# Altium PCB Mopf.PcbDoc
Units mil, origin at the board's own origin, x right, y up, seen from the top; angles counter-clockwise.
Board outline 773.92 x 799.91 mil, 4 copper layers (TOP, SIG, VSS, BOT), stack 31.6 mil thick; 38 components, 59 nets, 162 pads, 121 vias.
Unrouted connection lines stored in the file: 1.
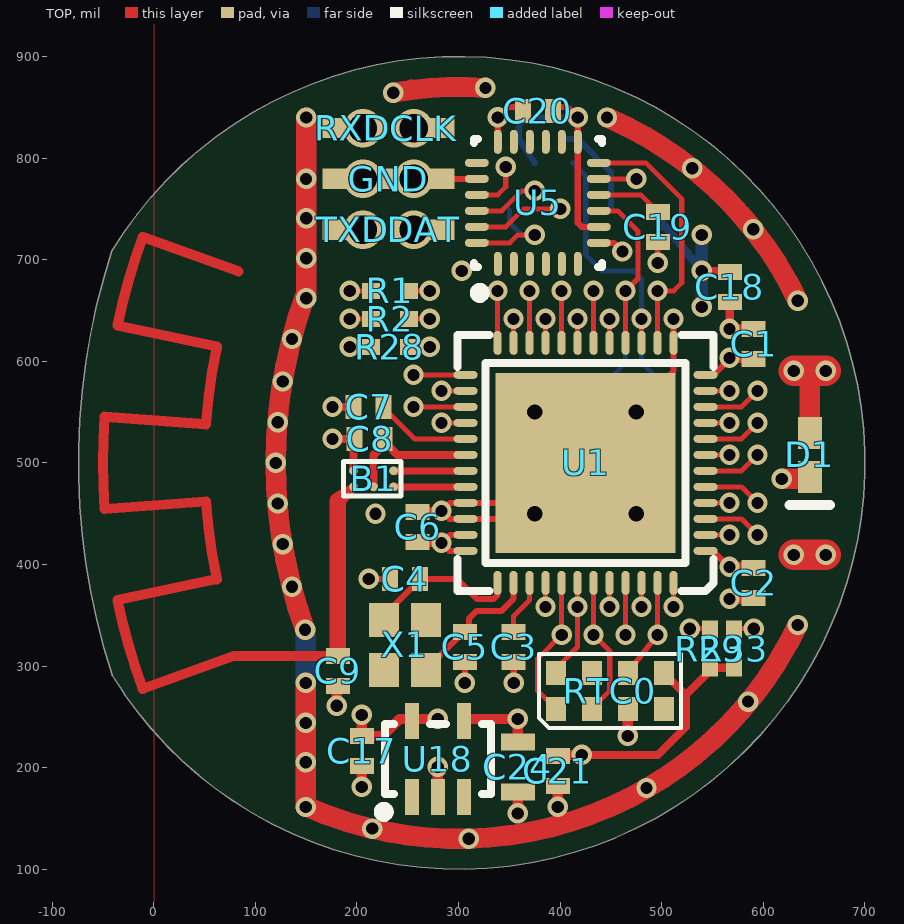
[diagram p0: TOP view]
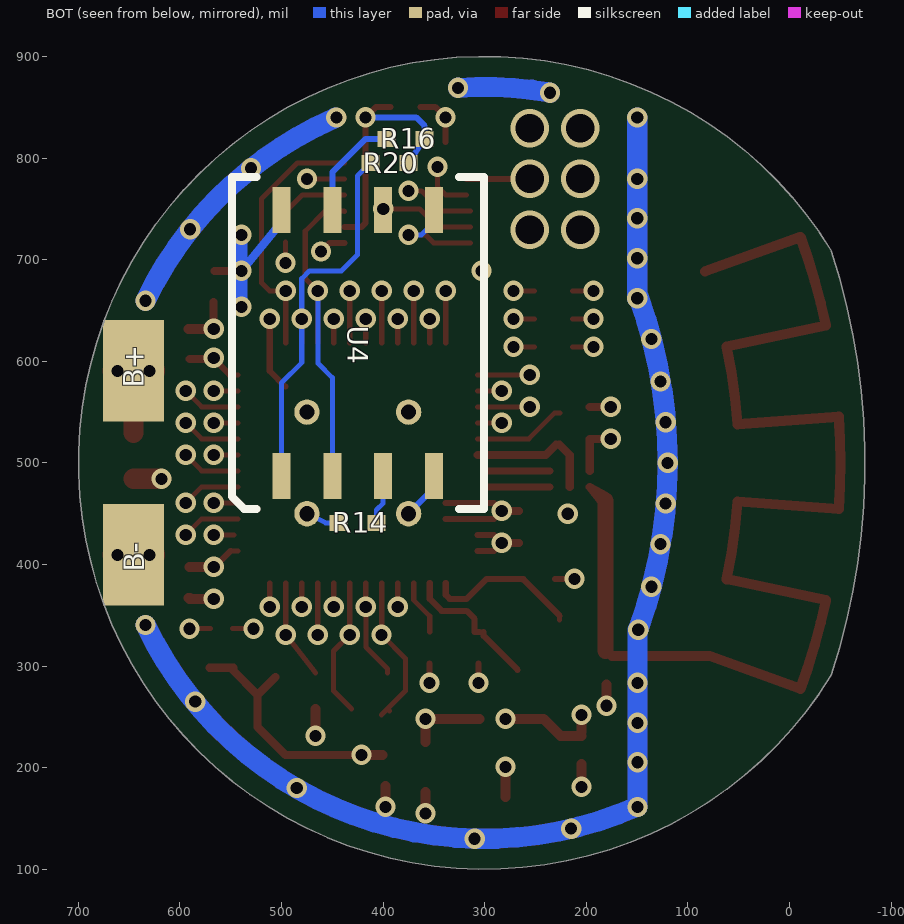
[diagram p1: BOT view, seen from below]
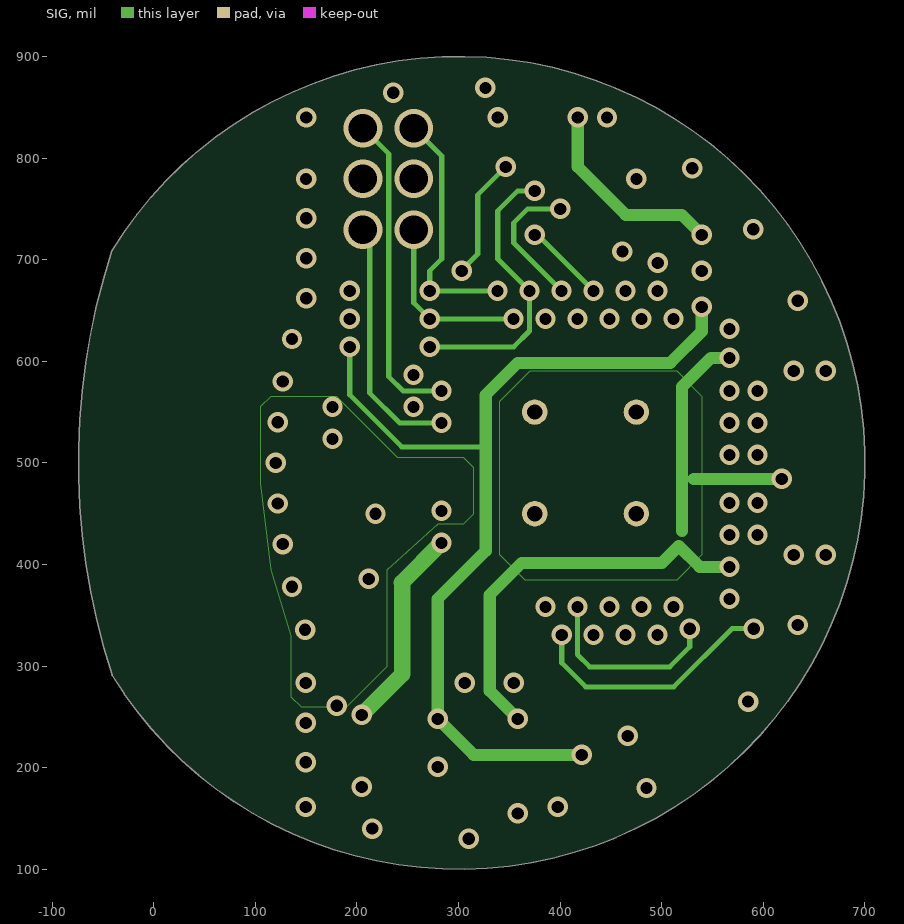
[diagram p2: SIG]
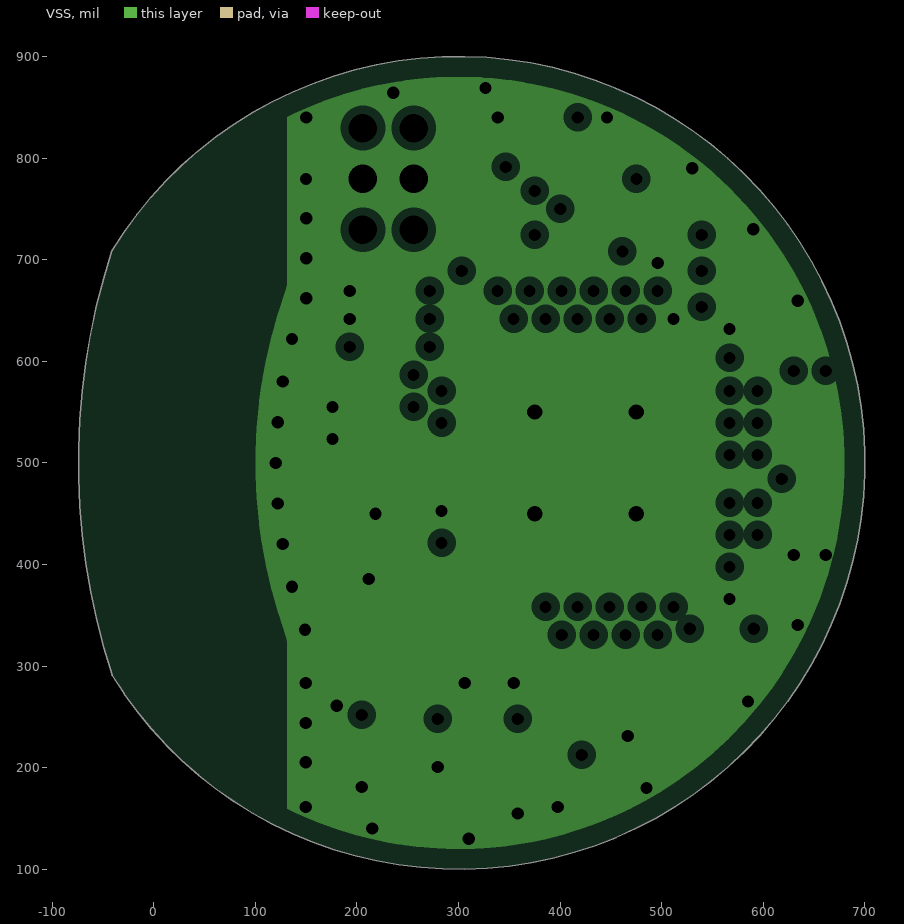
[diagram p3: VSS, clearances drawn from the general rule]

## Layer stack, top to bottom
Top Solder: solder mask 0.4, Solder Resist, Dk 3.5
TOP: signal copper 1.4
Dielectric1: prepreg 6, FR-4, Dk 4.8
SIG: signal copper 1.4
Dielectric2: core 14, FR-4, Dk 4.8
VSS: plane copper 1.4, net GND
Dielectric3: prepreg 6, FR-4, Dk 4.8
BOT: signal copper 1.4
Bottom Solder: solder mask 0.4, Solder Resist, Dk 3.5

## Board outline
-41.11,291.08 ccw(c300,500) -41.26,708.66 -41.17,708.61 ccw(c600.79,500)

## Design rules (kind name [scope] priority, off if disabled: settings)
Clearance "Top Polygon" [(InPolygon)] p1: gap=5
Clearance [All] p2: gap=3
ComponentClearance [All] p1: gap=5 collisioncheckmode=3 verticalgap=5 showdistances=FALSE
FabricationTestPointUsage TestPointUsage [All] p1: valid=0 allowmultiple=FALSE
FabricationTestpoint Testpoint [All] p1: side=3 testpointundercomponent=TRUE minsize=40 maxsize=100 preferedsize=60 minholesize=0 maxholesize=40 preferedholesize=32 testpointgrid=1 allowsidetop=TRUE allowsidebottom=TRUE usegrid=TRUE gridtolerance=0.01
HoleSize [All] p1: absolutevalues=TRUE maxlimit=250 minlimit=3 maxpercent=80.000 minpercent=20.000
MinimumAnnularRing [All] p1: minimumring=2
PasteMaskExpansion [All] p1: expansion=-1
PlaneClearance [All] p1: clearance=8
PlaneConnect [All] p1: planeconnectstyle=Direct reliefexpansion=25 reliefentries=4 reliefconductorwidth=20 reliefairgap=10
PolygonConnect [All] p1: connectstyle=Direct reliefconductorwidth=15 reliefentries=4 polygonreliefangle="45 Angle" airgapwidth=10
RoutingLayers [All] p1: top layer_v5=TRUE mid layer 2_v5=FALSE bottom layer_v5=TRUE
RoutingVias [All] p1: holewidth=12 width=22 viastyle="Through Hole" minholewidth=3 minwidth=8 maxholewidth=65 maxwidth=100
SilkToSolderMaskClearance SilkscreenOverComponentPads [IsPad] p1: minsilkscreentomaskgap=10 clearancetoexposedcopper=TRUE
SolderMaskExpansion [All] p1: expansion=3
Width [All] p1: maxlimit=200 minlimit=3 preferedwidth=10 toplayer_maxwidth=100 midlayer2_maxwidth=100 minimp=50.000000 maximp=50.000000 favimp=50.000000
20 further rules are at their usual default settings.

## Classes and differential pairs
component class Mopq: * B+ B- C9 C17 C24 D1 ID1 U18
component class Motion: C19 C20 C21 R28 U5
component class Memory: C18 R14 R16 R20 U4
component class Bluetooth: B1 C1 C2 C3 C4 C5 C6 C7 C8 CLK DAT R1 R2 RTC0 RXD TXD U1 X1

## Components (designator, comment, footprint, x,y, rotation, side; value= is the part's Value field where it differs from the comment)
B1 "BAL-NRF02D3" BAL-ST-WLCSP 216.34,484.25 r180 top locked
B+ "5016" TP0875x050#1 651.97,578.15 r180 bottom
B- "5016" TP0875x050#2 651.97,417.91 r90 bottom
C1 "0.1u" CAP0402 590.35,617.13 r270 top
C2 "0.1u" CAP0402 590.35,381.89 r90 top
C3 "0.1u" CAP0402 354.13,318.9 r90 top
C4 "27p" CAP0402 247.09,385.83 r0 top
C5 "27p" CAP0402 306.14,318.9 r90 top
C6 "1000p" CAP0402 259.65,437.01 r270 top
C7 "0.047u" CAP0402 211.42,555.12 r0 top
C8 "2200p" CAP0402 212.4,523.62 r0 top
C9 "1.0p" CAP0402 181.1,295.28 r90 top
C17 "4.7u" CAP0402 204.72,216.54 r90 top
C18 "0.1u" CAP0402 566.93,673.23 r90 top
C19 "0.1u" CAP0402 496.06,732.28 r90 top
C20 "10nF" CAP0402 377.95,846.46 r0 top
C21 "0.1u" CAP0402 397.64,196.85 r90 top
C24 "4.7u" CAP0603 358.27,200.79 r90 top
CLK "5016" TP0875x050#3 265.91,829.53 r90 top
D1 "1PS79SB31" SOD-523 645.67,507.87 r90 top
DAT "5016" TP0875x050#4 255.91,729.53 r180 top
GND "5016" TP0875x050#5 230.91,779.53 r90 top
R1 "12k" RES0402 232.28,669.29 r180 top
R2 "12k" RES0402 232.28,641.73 r180 top
R14 "100k" RES0402 425.2,440.94 r180 bottom
R16 "100k" RES0402 377.95,818.9 r180 bottom
R20 "100k" RES0402 393.7,795.28 r0 bottom
R28 "100k" RES0402 232.28,614.17 r180 top
R29 "100k" RES0402 547.24,317.09 r270 top
R33 "100k" RES0402 570.87,317.09 r270 top
RTC0 "AB-RTCMC-32.768kHz-AIGZ" 8-CLCC 448.82,275.59 r0 top
RXD "5016" TP0875x050#3 195.91,829.53 r90 top
TXD "5016" TP0875x050#3 195.91,729.53 r90 top
U1 "nRF51822-QF" VQFN40P600X600X100-48 425,500 r180 top locked
U4 "MX25U12835F" "WSON 8L" 425,618.11 r90 bottom
U5 "InvenSense MPU-6500" QFN-24 377.95,755.9 r90 top locked
U18 "TPS79718" SOT65P212X110-5N 279.53,208.66 r90 top locked
X1 "ILCX19" ILCX19 211.65,362.2 r270 top

## Footprints (in the part's own frame and the unit in brackets; to place one, negate y for a bottom-side part, rotate by r counter-clockwise, add the part's x,y. Pads: shape width x height; smd on the part's side, far side on the other; paste and mask are expansions set on the pad)
8-CLCC [mm] "8 lead CLCC package, 2.3 x 1.5mm"
  rect 0.5x0.6 smd: 1(-1.35,-0.45) 2(-0.45,-0.45) 3(0.45,-0.45) 4(1.35,-0.45) 5(1.35,0.45) 6(0.45,0.45) 7(-0.45,0.45) 8(-1.35,0.45)
  silkscreen extent -1.78,-0.92 1.78,0.92, body extent -1.6,-0.75 1.6,0.75, height 0.8
BAL-ST-WLCSP [mm]
  round 0.22 smd mask+0.05: A1(0.5,0.2) A2(0,0.2) A3(-0.5,0.2) B1(0.5,-0.2) B3(-0.5,-0.2)
  TOP pour cut-out: -0.697,-0.43 0.756,-0.43 0.756,0.44 -0.697,0.44
  silkscreen extent -0.69,-0.43 0.76,0.43, body extent -0.7,-0.43 0.76,0.43, height 0.63
CAP0402 [mm] "Chip Capacitor, 2-Leads, Body 0402 / 0.10x0.50mm, IPC High Density"
  rect 0.4x0.6 smd: 1(-0.375,0) 2(0.375,0)
  body extent -0.53,-0.28 0.53,0.28, height 0.55
CAP0603 [mm] "Chip Capacitor, 2-Leads, Body 0603 / 1.60x0.8mm, IPC High Density"
  rect 0.425x0.85 smd: 1(-0.625,0) 2(0.625,0)
  body extent -0.8,-0.4 0.8,0.4, height 0.8
ILCX19 [mm] "ILSI ILCX19 Crystal Oscillator 2.0 x 1.6 x 0.45mm"
  rect 0.85x0.75 smd: 1(0.425,0.375) 2(1.675,0.375) 3(1.675,1.425) 4(0.425,1.425)
  body extent 0.05,0.1 2.05,1.7, height 0.45
QFN-24 [mm]
  oval 0.6x0.2 smd: 1(-1.525,1) 2(-1.525,0.6) 3(-1.525,0.2) 4(-1.525,-0.2) 5(-1.525,-0.6) 6(-1.525,-1) 13(1.525,-1) 14(1.525,-0.6) 15(1.525,-0.2) 16(1.525,0.2) 17(1.525,0.6) 18(1.525,1)
  oval 0.2x0.6 smd: 7(-1,-1.525) 8(-0.6,-1.525) 9(-0.2,-1.525) 10(0.2,-1.525) 11(0.6,-1.525) 12(1,-1.525) 19(1,1.525) 20(0.6,1.525) 21(0.2,1.525) 22(-0.2,1.525) 23(-0.6,1.525) 24(-1,1.525)
  TOP pour cut-out: -1.35,1.35 -1.35,-1.35 1.35,-1.35 1.35,1.35
  silkscreen extent -2.37,-1.6 1.6,1.6, body extent -1.45,-1.45 1.45,1.45, height 0.95
RES0402 [mm] "Chip resistor 0402 high density"
  rect 0.45x0.4 smd: 1(-0.475,0) 2(0.475,0)
  body extent -0.61,-0.2 0.6,0.2, height 0.5
SOD-523 [mm] "Diode small package"
  rect 0.8x0.6 smd: 1(0.55,0) 2(-0.55,0)
  silkscreen extent -1.25,-0.5 -1.25,0.5, body extent -1.12,-0.6 1.12,0.6, height 0.65
SOT65P212X110-5N [mm] "SOT23, 5-Leads, Body 2.3x2.3mm (max), Pitch 0.65mm, IPC Medium Density"
  rect 0.9x0.35 smd: 1(-0.95,0.65) 2(-0.95,0) 3(-0.95,-0.65) 4(0.95,-0.65) 5(0.95,0.65)
  silkscreen extent -1.45,-1.33 0.88,1.47, body extent -0.67,-1.12 0.67,1.13, height 1.1
TP0875x050#1 [mm] "Test Pad 0.875x0.50mm"
  rect 1.524x2.54 smd: 1(0.16,0.315)
TP0875x050#2 [mm] "Test Pad 0.875x0.50mm"
  rect 2.54x1.524 smd: 1(-0.215,-0.16)
TP0875x050#3 [mm] "Test Pad 0.875x0.50mm"
  rect 0.508x1.524 smd: 1(0,0)
TP0875x050#4 [mm] "Test Pad 0.875x0.50mm"
  rect 1.524x0.508 smd: 1(-0.254,0)
TP0875x050#5 [mm] "Test Pad 0.875x0.50mm"
  rect 0.508x3.302 smd: 1(0,0)
VQFN40P600X600X100-48 [mm]
  round 0.635 hole 0.381: 0(-1.27,1.27) 0(-1.27,-1.27) 0(1.27,1.27) 0(1.27,-1.27)
  rect 4.5x4.5 smd: 0(0,0)
  oval 0.6x0.2 smd: 1(-3,2.2) 2(-3,1.8) 3(-3,1.4) 4(-3,1) 5(-3,0.6) 6(-3,0.2) 7(-3,-0.2) 8(-3,-0.6) 9(-3,-1) 10(-3,-1.4) 11(-3,-1.8) 12(-3,-2.2) 25(3,-2.2) 26(3,-1.8) 27(3,-1.4) 28(3,-1) 29(3,-0.6) 30(3,-0.2) 31(3,0.2) 32(3,0.6) 33(3,1) 34(3,1.4) 35(3,1.8) 36(3,2.2)
  oval 0.2x0.6 smd: 13(-2.2,-3) 14(-1.8,-3) 15(-1.4,-3) 16(-1,-3) 17(-0.6,-3) 18(-0.2,-3) 19(0.2,-3) 20(0.6,-3) 21(1,-3) 22(1.4,-3) 23(1.8,-3) 24(2.2,-3) 37(2.2,3) 38(1.8,3) 39(1.4,3) 40(1,3) 41(0.6,3) 42(0.2,3) 43(-0.2,3) 44(-0.6,3) 45(-1,3) 46(-1.4,3) 47(-1.8,3) 48(-2.2,3)
  silkscreen extent -3.2,-3.2 3.2,3.2
"WSON 8L" [mm] "WSON 8L 8x6x0.8mm"
  rect 1.15x0.45 smd: 1(-3.325,1.905) 2(-3.325,0.635) 3(-3.325,-0.635) 4(-3.325,-1.905) 5(3.325,-1.905) 6(3.325,-0.635) 7(3.325,0.635) 8(3.325,1.905)
  silkscreen extent -4.15,-3.15 4.15,3.15, body extent -4,-3 4,3, height 0.8

## Part data
B1: library part BAL-ST-5pin_DC-Flip, "50 ohm balun transformer for 2.45GHz ISM"
B+ B- CLK DAT GND RXD TXD: "Single-pad test point"
C1 C2 C3 C19 C21: library part C_0.1u_10_10_X5R_0201, "Chip capacitor"
C4 C5: library part C_27p_5_50_C0G_0201, "Chip capacitor"
C6: library part C_1000p_10_25_X7R_0201, "Chip capacitor"
C7: library part C_0.047u_10_16_X7R_0402, "Chip capacitor"
C8 C9: library part C_2200p_5_16_STD_0402, "Chip capacitor"
C17 C24: library part C_4.7u_10_10_JB_0402, "Chip capacitor"
C18: library part C_0.1u_10_6.3_X5R_0201, "Chip capacitor"
C20: library part CAP0201, "Chip capacitor"
D1: "Schottky diode, 30V 200mA"
R1 R2: library part R_12k_0.5_0.063_0402, "Chip Resistor"
R14 R16 R20 R28 R29 R33: library part R_100k_5_0.05_0201, "Chip Resistor"
RTC0: "Abracon I2C RTC w/ integrated XO"
U1: library part nRF51822_QF, "Multi-protocol Bluetooth Low Energy and 2.4GHz proprietary system-on-chip"
U4: "Macronix MX25U12835F SPI NOR Flash"
U5: library part MPU-6500, "InvenSense MPU-6500 6-axis accelerometer and gyroscope"
U18: library part TPS79718DCK, "LDO 1.8V SC70-5"
X1: "ILSI ILCX19 Crystal Oscillator"

## Via types
v1: diameter 20, hole 12, TOP to BOT, 115 vias
v2: diameter 38, hole 28, TOP to BOT, 6 vias

## Nets (pads, with @x,y where several pads share a name; then routed paths per layer and width w, separated by ;. In a path a pad name is that pad's centre, name@x,y a point inside that pad or via, vN(x,y) a via of type N, cw(c..) or ccw(c..) an arc to the next point about the centre after c; other vN are vias at no path point)
1V8: C6.2 C17.2 U1.35 U1.36 | length 289.3
  TOP w6: U1.36 291.14,413.39 v1(283.27,421.26) 291.14,429.13 U1.35
  TOP w7.87: C6.2@266.54,421.26 v1(283.27,421.26)
  TOP w10: C17.2@204.72,235.24 v1(204.72,251.97)
  SIG w16: v1(204.72,251.97) 244.59,291.83 244.59,382.09 ; 244.09,382.09 v1(283.27,421.26)
1V8_EN: U1.3 | length 57.7
  TOP w5: U1.3 578.54,444.88 v1(594.29,429.13)
3V3_EN: U1.11 | length 23.6
  TOP w5: U1.11 v1(566.73,570.87)
AD_ENABLE: U1.48 | length 23.8
  TOP w5: v1(511.61,358.27) U1.48
  SIG w5: v1(511.61,358.27) v1@511.81,358.27
AIN0: U1.45 | length 51.2
  TOP w5: v1(464.37,330.71) U1.45
AIN1: U1.46 | length 23.6
  TOP w5: v1(480.12,358.27) U1.46
AIN2: U1.5 | length 57.7
  TOP w5: U1.5 578.54,476.38 v1(594.29,460.63)
AIN3: U1.6 | length 57.7
  TOP w5: U1.6 578.54,492.13 v1(594.29,507.87)
AIN4: U1.7 | length 23.6
  TOP w5: U1.7 v1(566.73,507.87)
AIN5: U1.8 | length 57.7
  TOP w5: U1.8 578.54,523.62 v1(594.29,539.37)
AIN6: U1.9 | length 23.6
  TOP w5: U1.9 v1(566.73,539.37)
AIN7: U1.10 | length 57.7
  TOP w5: U1.10 578.54,555.12 v1(594.29,570.87)
ANT1: B1.B3 U1.31 | length 63
  TOP w7: B1.B3 U1.31@299.02,492.13
ANT2: B1.A3 U1.32 | length 63
  TOP w7: B1.A3 U1.32@299.02,476.38
AUX_SCL: U5.7 | length 26.7
  TOP w6: U5.7 452.76,716.53 v1(461.22,708.07)
AUX_SDA: U5.21 | length 171
  TOP w5: U5.21 338.58,763.78 346.46,771.65 v1(346.46,791.34)
  SIG w5: v1@303.15,689.76 318.9,705.51 318.9,763.78 v1(346.46,791.34)
  other v1: 303.15,688.98
BLE_ANT: B1.A1 C9.2 | length 1300
  TOP w8: 181.47,467.94 B1.A1 185.83,462.6
  TOP w10: 51.31,462.02 -48.42,454.66 cw(c600,500) -48.42,545.34 51.31,537.98 ; 51.34,461.63 ccw(c600,500) 62.02,385.65 ; 51.34,538.37 cw(c600,500) 62.02,614.35 ; 62.05,385.49 -35.8,364.86 ccw(c600,500) -10.8,277.69 79.11,309.98 C9.2@174.93,309.98 ; 62.05,614.51 -35.8,635.14 cw(c600,500) -10.8,722.31 83.31,688.51
  TOP w16: C9.2@181.1,314.96 181.1,462.83
DCC: U1.2 | length 19.7
  TOP w5: U1.2@547.05,429.13 v1(566.73,429.13)
DEC1: C3.2 U1.39 | length 54.8
  TOP w5: C3.2 354.13,349.13 369.88,364.88 U1.39
DEC2: C7.2 U1.29 | length 91.3
  TOP w5: C7.2@226.18,549.21 231.1,549.21 256.69,523.62 U1.29
FLASH_CS: R20.2 U1.15 U4.1 | length 373.6
  TOP w5: U1.15 v1(480.12,641.73)
  BOT w5: R20.2 425.2,782.48 425.2,704.72 440.94,688.98 472.44,688.98 480.12,681.3 v1(480.12,641.73) 480.12,598.62 500,578.74 U4.1@500,500
FRST: R16.1 U4.7 | length 100.1
  BOT w6: R16.1@400.59,818.9 417.32,818.9 450,786.22 U4.7
FSYNC: U5.11 | length 37
  TOP w5: U5.11 v1(475,779.53)
FWPT: R14.2 U4.3 | length 49
  BOT w5: U4.3 400,460.24 406.5,453.74 R14.2
GND: B1.B1 B-.1 C1.1 C2.1 C3.1 C4.1 C5.1 C6.1 C7.1 C8.1 C9.1 C17.1 C18.1 C19.1 C20.1 C21.1 C24.1 GND.1 R1.2 R2.2 R14.1 RTC0.3 U1.0 U1.13 U1.33 U1.34 U4.4 U5.18 U5.20 U18.2 | length 4006.2
  TOP w5: v1(192.91,641.73) R2.2 ; v1(192.91,669.29) R1.2 ; v1(496.06,696.85) C19.1
  TOP w6: v1(211.65,385.83) C4.1@230.83,385.83 ; v2(255.91,779.53) U5.20 ; v1(306.14,283.46) C5.1@306.14,302.64 ; U1.0@338.39,444.88 U1.34 291.14,444.88 v1(283.27,452.76) 291.14,460.63 U1.33 U1.0@338.39,460.63 ; U5.18 338.58,840.05 348.92,850.39 C20.1@363.19,850.39 ; v1(354.33,283.46) C3.1@354.33,302.64 ; U1.0@496.18,575 511.61,590.43 U1.13 v1(511.61,641.73) v1@511.87,641.98
  TOP w7.87: C6.1@266.54,452.76 v1(283.27,452.76)
  TOP w8: v1(175.98,523.62) 196.65,523.62 B1.B1 ; v1(175.98,555.12) C7.1 ; v1@566.93,631.89 C18.1
  TOP w10: v1(180.16,260.9) C9.1@180.16,281.57 ; v1(204.72,181.1) C17.1@204.72,203.74 ; U18.2 v1(279.53,200.79) ; v1(358.27,155) C24.1 ; v1(397.64,161.42) C21.1 ; v1(466.54,231.3) RTC0.3 ; v1(566.73,366.14) C2.1@590.35,366.14 ; v1(566.73,631.89) C1.1@591.34,631.89 ; C2.1 C2.1@591.34,367.13
  TOP w20: v1(148.95,335.83) cw(c600,500) v1@148.95,664.17 ; v1(149.61,161.22) v1(149.61,283.46) ; v1@150,664.17 v1(150,840) ; v1@151.25,161.22 ccw(c300,500) v1(633.84,340.47) ; v1(235.75,864.38) cw(c300,500) v1(326.36,869.06) ; v1(446.03,839.96) cw(c300,500) v1(633.84,659.53)
  TOP w30: v1(629.92,409.45) v1(661.42,409.45)
  BOT w5: R14.1 456.69,440.94 U1.0@472.44,448.82
  BOT w6: U4.4@347.64,477.56 U1.0@375,450.2
  BOT w20: v1(148.95,335.83) cw(c600,500) v1@148.95,664.17 ; v1(149.61,161.22) v1@149.61,335.83 ; v1@149.88,161.82 ccw(c300,500) v1(633.84,340.47) ; v1(150,662.01) v1(150,840) ; v1(235.75,864.38) cw(c300,500) v1(326.36,869.06) ; v1@447,839.54 cw(c300,500) v1(633.84,659.53)
  other v1: 310,130 215,140 485,180 149.65,205.32 149.61,244.09 585,265 136,378 127,420 218.31,450 122,460 120,500 122,540 127,580 136,622 150,701.38 590,730 150,740.75 149.96,779.53 530,790 338.58,840.06
  other v2: 205.91,779.53
GPS_CS: U1.19 | length 23.6
  TOP w5: U1.19 v1(417.13,641.73)
GPS_EN: U1.21 | length 23.6
  TOP w5: U1.21 v1(385.63,641.73)
GPS_INT: U1.17 | length 23.6
  TOP w5: U1.17 v1(448.62,641.73)
HR_PWM: U1.27 | length 51.2
  TOP w5: v1(255.71,555.12) U1.27
  other v1: 255.71,555.12
HR_PWM2: U1.25 | length 51.2
  TOP w5: v1(255.71,586.61) U1.25
  other v1: 255.71,586.61
IMU_CS: R28.1 U1.22 U5.22 | length 443.7
  TOP w5: R28.1 v1(271.65,614.17) ; U5.22@313.98,748.03 342.52,748.03 362.2,767.72 374.02,767.72 v1@375,768.7 ; U1.22 v1(369.88,669.29)
  SIG w5: v1(271.65,614.17) 354.13,614.17 ; 354.33,614.17 369.88,629.72 v1(369.88,669.29) ; 354.33,684.84 v1(369.88,669.29) ; v1(375,767.72) 358.27,767.72 338.58,748.03 338.58,700.59 v1(369.88,669.29)
IMU_INT: U1.14 U5.12 | length 257.5
  TOP w5: U5.12 484.25,795.28 519.68,759.84 519.68,744.09 519.68,677.17 511.81,669.29 v1(495.87,669.29) U1.14
  BOT w6: v1(495.87,669.29) v1@495.87,669.49
IMU_MISO: U1.16 U4.2 U5.9 | length 337.4
  TOP w5: U5.9@437.99,747.44 438.58,748.03 456.69,748.03 476.72,728 476.72,681.45 v1@464.57,669.29 ; U1.16 v1(464.37,669.29)
  BOT w5: U4.2@450,500 450,583.86 464.12,597.98 464.12,669.04 v1(464.37,669.29)
IMU_MOSI: U1.18 U4.5 U5.24 | length 239.8
  TOP w5: U5.24@313.98,716.53 350.39,716.53 358.27,724.41 v1(375,724.41) ; U1.18 v1@432.87,671.26
  SIG w5: v1@376.38,725.79 v1(432.87,669.29)
  BOT w5: U4.5 350,736.61 362.2,724.41 v1(375,724.41)
IMU_SCLK: U1.20 U4.6 U5.23 | length 282.3
  TOP w5: U5.23@313.98,732.28 346.46,732.28 364.17,750 v1(400,750) ; U1.20 v1(401.38,669.29)
  SIG w5: 354.23,716.44 v1(401.38,669.29) ; 354.33,716.54 354.33,736.22 368.11,750 v1(400,750)
NBAT_STS: U1.44 | length 23.6
  TOP w5: v1(448.62,358.27) U1.44
NetC19_2: C19.2 U5.10 | length 65
  TOP w5: U5.10 479.33,763.78 C19.2
NetC52_1: 
NetR4_2: 
NetR14_2: 
NGG_INT: U1.40 | length 23.6
  TOP w5: v1(385.63,358.27) U1.40
NRESET: U18.1
RTC_CLK: RTC0.2 U1.43 | length 138
  TOP w5: RTC0.2 448.82,275.59 448.82,314.76 v1(432.87,330.71) U1.43
RTC_INT: RTC0.6 U1.47 | length 96.1
  TOP w5: RTC0.6 v1@494.09,328.74 ; v1(495.87,330.71) U1.47
RTC_SCL: R29.1 RTC0.8 U1.42 | length 306.6
  TOP w5: RTC0.8 395.67,297.24 417.07,318.65 417.07,358.22 v1(417.13,358.27) U1.42 ; v1(527.56,336.77) R29.1@548.23,336.77
  SIG w5: v1(417.13,358.27) 417.13,311.22 429.13,299.21 507.87,299.21 527.56,318.9 v1(527.56,336.77)
RTC_SDA: R33.1 RTC0.1 U1.41 | length 422.9
  TOP w5: RTC0.1@393.7,255.91 RTC0.1 ; U1.41 401.38,330.71 377.95,307.28 377.95,275.59 RTC0.1 ; RTC0.1@401.57,251.97 RTC0.1 ; R33.1@569.88,336.77 v1(590.55,336.77)
  SIG w5: v1(401.57,330.71) 401.57,303.15 425.2,279.53 511.81,279.53 569.06,336.77 v1(590.55,336.77)
RXD: RXD.1 U1.26 | length 336.6
  TOP w5: v1(283.27,570.87) U1.26
  SIG w5: v2(205.91,829.53) 231.3,804.13 231.3,584.88 245.32,570.87 v1(283.27,570.87)
  other v1: 283.27,570.87
STATUS0: 
STATUS1: 
SWDCLK: CLK.1 R1.1 U1.24 | length 315.1
  TOP w5: R1.1 v1(271.65,669.29) ; U1.24 v1(338.39,669.29)
  SIG w5: v2(255.91,829.53) 283.46,801.97 283.46,700.79 271.65,688.98 v1(271.65,669.29) v1(338.39,669.29)
SWDIO: DAT.1 R2.1 U1.23 | length 221.1
  TOP w5: R2.1 v1(271.65,641.73) ; U1.23 v1(354.13,641.73)
  SIG w5: v2(255.91,729.53) 255.91,657.48 v1(271.65,641.73) v1(354.13,641.73)
TXD: TXD.1 U1.28 | length 311.6
  TOP w5: v1(283.27,539.37) U1.28
  SIG w5: v2(205.91,729.53) 212.6,722.83 212.6,568.58 241.81,539.37 ; 241.81,539.37 v1(283.27,539.37) 241.81,539.37
  other v1: 283.27,539.37
VBAT: B+.1 D1.1 | length 92.5
  TOP w20: D1.1 645.67,590.55
  TOP w30: v1(629.92,590.55) v1(661.42,590.55)
VDD_PA: B1.A2 C8.2 U1.30 | length 130.3
  TOP w5.91: C8.2@226.3,517.83 C8.2@230,517.83
  TOP w8: B1.A2 216.34,507.87 C8.2@226.3,517.83 ; C8.2@230,517.83 239.96,507.87 291.14,507.87 U1.30
VIBE_EN: U1.4 | length 23.6
  TOP w5: U1.4 v1(566.73,460.63)
VIMU: C18.2 C20.2 C21.2 R16.2 R20.1 R28.2 R29.2 R33.2 RTC0.5 U4.8 U5.8 U5.13 U18.5 | length 1942.7
  TOP w5: v1(192.91,614.17) R28.2
  TOP w6: C20.2@392.72,850.38 406.99,850.38 v1(417.32,840.05) U5.13 417.32,736.22 421.26,732.28 U5.8
  TOP w8: v1(421.26,212.6) 496.06,212.6 523.62,240.16 523.62,271.65 ; RTC0.5@505.91,289.37 523.62,271.65 ; v1(539.37,688.98) C18.2@565.95,688.98 ; R29.2 R33.2 ; R29.2@548.8,296.83 523.62,271.65
  TOP w10: 204.72,231.3 225.39,231.3 242.13,248.03 v1(279.53,248.03) ; C21.2@400.59,212.6 v1(421.26,212.6)
  SIG w5: v1(192.91,614.17) 192.91,566.93 244.09,515.75 326.77,515.75
  SIG w12: v1(417.32,840.05) 417.32,791.34 464.57,744.09 519.68,744.09 v1(539.37,724.41) ; v1(421.26,212.6) 314.96,212.6 v1(279.53,248.03) 279.53,366.14 326.77,413.39 326.77,566.93 358.27,598.43 508.43,598.43 539.37,629.37 v1(539.37,653.54)
  BOT w6: R20.1 R16.2 359.25,831.69 367.61,840.05 v1(417.32,840.05)
  BOT w8: U4.8@500,732.28 U4.8 ; U4.8@503.94,732.28 v1(539.37,688.98) v1@539.37,692.91
  BOT w12: v1(539.37,653.54) v1(539.37,688.98) v1(539.37,724.41)
VMCU: C1.2 C2.2 C24.2 D1.2 U1.1 U1.12 U18.4 | length 896.4
  TOP w5: U1.1 U1.1@550,413.39 ; U1.12 U1.12@550.98,586.61
  TOP w6: U1.1@550,413.39 v1@566.73,396.65 ; U1.12@550.98,586.61 v1@566.73,602.36
  TOP w8: v1@566.73,602.36 C1.2
  TOP w10: U18.4@305.12,248.03 v1(358.27,248.03) C24.2 ; v1(566.73,397.64) C2.2@590.35,397.64
  TOP w20: v1(618.11,484.25) D1.2@645.67,484.25
  SIG w12: v1(358.27,248.03) 330.71,275.59 330.71,370.08 362.2,401.57 500.2,401.57 516.81,418.19 537.36,397.64 v1(566.73,397.64) ; 520,432.87 520,575 548.35,603.35 v1(566.73,603.35) ; 531.5,484.25 v1(618.11,484.25)
XC1: C4.2 U1.37 X1.1 | length 153.2
  TOP w5: X1.1 X1.1@226.42,349.41 ; C4.2@261.85,384.84 C4.2
  TOP w6: X1.1@226.42,349.41 C4.2@261.85,384.84 ; C4.2 298.27,385.83 317.95,366.14 334.45,366.14 338.39,370.08 U1.37
XC2: C5.2 U1.38 X1.3 | length 136.9
  TOP w6: X1.3 301.22,329.72 C5.2@301.22,333.66 ; C5.2@305.16,333.66 310.08,333.66 310.08,346.46 317.95,354.33 342.32,354.33 354.13,366.14 U1.38
pads on no net: RTC0.4 RTC0.7 U5.1 U5.2 U5.3 U5.4 U5.5 U5.6 U5.14 U5.15 U5.16 U5.17 U5.19 U18.3 X1.2 X1.4

## Polygon pours and split planes (outlines as drawn)
VMCU on SIG "Top-Shield" (solid, shelved, pour order 6): 340,410 365,385 515,385 540,410 540,565 515,590 370,590 340,560
GND on SIG "Top-Shield" (solid, shelved, pour order 4): 135,270 145,260 190,260 230,300 230,395 280,440 305,440 315,450 315,495 305,505 240,505 180,565 115,565 105,555 105,480 115,395 135,330
no net on TOP "Top-Shield" (solid, shelved, pour order 12): 0,3950 0,50 50,0 2650,0 2700,50 2700,3950 2650,4000 50,4000 0,3950
no net on BOT "Bottom-Power" (solid, shelved, pour order 7): 2649.04,4000 1425.96,4000 1375,3950 1375,2700 1425.96,2650 2649.04,2650 2700,2700 2700,3950 2649.04,4000
GND on VSS (split plane): 316.57,879.63 333.12,878.54 349.6,876.74 365.98,874.22 382.24,870.98 398.35,867.04 414.27,862.4 429.96,857.07 445.42,851.07 460.59,844.39 475.46,837.06 490,829.08 504.17,820.48 517.95,811.27 531.32,801.47 544.25,791.09 556.72,780.16 568.69,768.69 580.16,756.72 591.09,744.25 601.47,731.32 611.27,717.95 620.48,704.17 629.08,690 637.06,675.46 644.39,660.59 651.07,645.42 657.07,629.96 662.4,614.27 667.04,598.35 670.98,582.24 674.22,565.98 676.74,549.6 678.54,533.12 679.63,516.57 679.99,500 679.63,483.43 678.54,466.88 676.74,450.4 674.22,434.02 670.98,417.76 667.04,401.65 662.4,385.73 657.07,370.04 651.07,354.58 644.39,339.41 637.06,324.54 629.08,310 620.48,295.83 611.27,282.05 601.47,268.68 591.09,255.75 580.16,243.28 568.69,231.31 556.72,219.84 544.25,208.91 531.32,198.53 517.95,188.73 504.17,179.52 490,170.92 475.46,162.94 460.59,155.61 445.42,148.93 429.96,142.93 414.27,137.6 398.35,132.96 382.24,129.02 365.98,125.78 349.6,123.26 333.12,121.46 316.57,120.37 300,120.01 283.43,120.37 266.88,121.46 250.4,123.26 234.02,125.78 217.76,129.02 201.65,132.96 185.73,137.6 170.04,142.93 154.58,148.93 139.41,155.61 131.46,159.53 131.46,322.15 131.07,326.07 130.18,329 130.19,329 130.09,329.29 129.93,329.84 129.86,329.97 124.48,345.49 118.78,364.28 113.82,383.28 109.61,402.46 106.16,421.78 103.47,441.23 101.54,460.77 100.39,480.37 100,500 100.39,519.63 101.54,539.23 103.47,558.77 106.16,578.22 109.61,597.54 113.82,616.72 118.78,635.72 124.48,654.51 129.86,670.03 129.93,670.16 130.09,670.71 130.19,671 130.18,671 131.07,673.93 131.46,677.85 131.46,840.47 139.41,844.39 154.58,851.07 170.04,857.07 185.73,862.4 201.65,867.04 217.76,870.98 234.02,874.22 250.4,876.74 266.88,878.54 283.43,879.63 300,879.99

## Other copper
TOP:
  text "1" at 1000,350 h60 r90
SIG:
  text "2" at 1000,425 h60 r90
BOT:
  text "4" at 1000,625 h60 r90
VSS (plane layer: these items are gaps in the copper):
  region: 1030,325 1030,500 900,500 900,325
  region: 1025,593.7 1025,700 895,700 895,593.7
  lines w40: -60,380 -60,620 ; -25,275 -25,730 ; 10,230 10,770 ; 45,195 45,805 ; 78.9,580 78.9,829.58 ; 80,169.62 80,425 ; 111.36,151.77 111.36,322.15 cw(c600,500) 111.36,677.85 111.36,848.23
  text "3" at 1000,525 h60 r90

## Silkscreen, mask and mechanical layers (free items; w line width, h text height)
Mechanical 1:
  lines w10: -41.26,708.66 cw(c300,500) -41.11,291.08 cw(c600.79,500) -41.17,708.61 ; 500,153.59 cw(c558.65,60.56) 668.62,60.01 668.62,0 ; 500,846.41 ccw(c558.65,939.44) 668.62,939.99 668.62,1000
Mechanical 13:
  circle w10: c517.13,503.94 r25
  circle w10: c350,500 r500
  circle w10: c400,500 r400
  circle w10: c300,500 r400
Mechanical 15:
  lines w10: 93.11,303.15 -25,303.15 -25,381.89 93.11,381.89 93.11,460.63 -25,460.63 -25,539.37 93.11,539.37 93.11,618.11 -25,618.11 -25,696.85 93.11,696.85
Drill Drawing:
  lines w5: 7140,-710 7140,1790 12890,1790 ; 7156,-710 12890,-710 ; 8015.23,4347.28 10215.23,4347.28 ; 9340,-710 9340,-460 ; 9340,1790 9340,965 ; 10665,15 10665,440 ; 11440,-696 11440,-464 11440,15 11440,440 ; 12879,961 9340,965 ; 12890,-700 12890,1797 ; 12890,-460 9340,-460 ; 12890,15 9340,15 ; 12890,440 9340,440 ; 9340,-460 9340,15 ; 9340,15 9340,440 ; 9340,440 9340,965
  lines w8: 7156,-710 -1435,-710 -1435,8650 12890,8650 12890,1785
  lines w20: 1125,1950 2075,1950 ; 1125,2100 2075,2100 ; 1125,2350 2075,2350 ; 1125,2500 2075,2500
  text "FABRICATION NOTES" at 7486,8095 h120
  text "4 LAYER BOARD" at 7481,7866 h120
  text "1. Material to be CEM3, FR4, or MC3 @" at 7502,7626 h85
  text "0.031\" +/- .005\" nominal thickness." at 9900,7626 h85
  text "2. Finished copper thickness to" at 7494,7484 h85
  text "be 1 oz." at 9370,7484 h85
  text "requirements for" at 10913,7362 h85
  text "nent side to meet IPC600" at 9325,7355 h85
  text "3. All holes drilled from compo" at 7494,7348 h85
  text "breakout.  Hole size indicates finished diameter" at 7660,7225 h85
  text "4. All tooling hole centers to be within +/- .003\" of center of datum hole" at 7494,7074 h85
  text "All other hole centers to be within +/- .005\" of center datum hole" at 7668,6937 h85
  text "5. Trace width reduction due to etch factor, pits or dents is not to exceed .005\"" at 7494,6792 h85
  text "6. Minimum annular ring to meet" at 7501,6633 h85
  text "IPC600 requirements." at 9492,6626 h85
  text "7. Apply silkscreen using white" at 7501,6460 h85
  text "epoxy ink to component side," at 9347,6460 h85
  text "per artwork provided." at 11163,6460 h85
  text "8. Apply soldermask over bare copper per artwork provided." at 7501,6301 h85
  text "PC401 or SR1000 Green." at 7665,6160 h85
  text "9. Boards must display manufacturers UL company ID (or Trademark) and type" at 7510,6030 h85
  text "designator in copper or white epoxy ink." at 7660,5900 h85
  text "+/-" at 7481.35,4693.22 h85
  text ".XX" at 9323.92,2996.81 h85
  text "ANGLES" at 10313.92,2996.81 h85
  text ".XXX" at 9743.92,2988.81 h85
  text ".LEGEND" at 7625,2950 h100
  text ".005" at 9743.92,2828.81 h85
  text ".01" at 9331.92,2823.81 h85
  text "dimensions are in inches" at 10864.16,2781.72 h85
  text "Tolerances are:" at 10864.16,2631.72 h85
  text "Top Layer" at 450,2475 h60
  text "PrePreg" at 1475,2410 h30
  text "Sig Layer" at 450,2350 h60
  text "0.014 Core" at 1450,2200 h30
  text "0.031 +- 0.005 mils" at 2225,2200 h100
  text "Gnd Layer" at 450,2100 h60
  text "PrePreg" at 1480,2010 h30
  text "Bot Layer" at 450,1900 h60
  text "Unless otherwise specified" at 7276,1606 h85
  text "SayHello" at 10725,1600 h120
  text "1660 17th St" at 10525,1400 h120
  text "San Fransciso, CA 94105" at 10253,1239 h120
  text "Top Side Compenent Designators" at -145,1135 h30
  text "(415) 000-0000" at 10441,1044 h120
  text "TITLE:" at 9385,826 h85
  text "FABRICATION DRAWING" at 10305,765 h100
  text "Pill Fab Drawing" at 9793,560 h120
  text "B: Add Voltage level shifting" at 7205,531 h90
  text "D:make pin 8 of J2 go to chassis" at 7205,345 h90
  text "DWG NO.:" at 9392,316 h85
  text "REV:" at 10743,316 h85
  text "ECO NO.:" at 11515,316 h85
  text "A" at 11108,140 h120
  text "000-00000" at 9450,130 h120
  text "DRAWN BY:" at 9422,-134 h85
  text "DATE:" at 11530,-134 h85
  text "Dyke Shaffer" at 10234,-289 h120
  text "05.18.14" at 11828,-311 h120
  text "SCALE:" at 9385,-584 h85
  text "SHEET" at 11523,-629 h85
  text "OF" at 12258,-636 h85
  text "1" at 12036,-638 h120
  text "1" at 12519,-638 h120
  text "N/A" at 9869,-648 h120